# EAGLE board UavxMbedV1v1 (EAGLE 5.09)
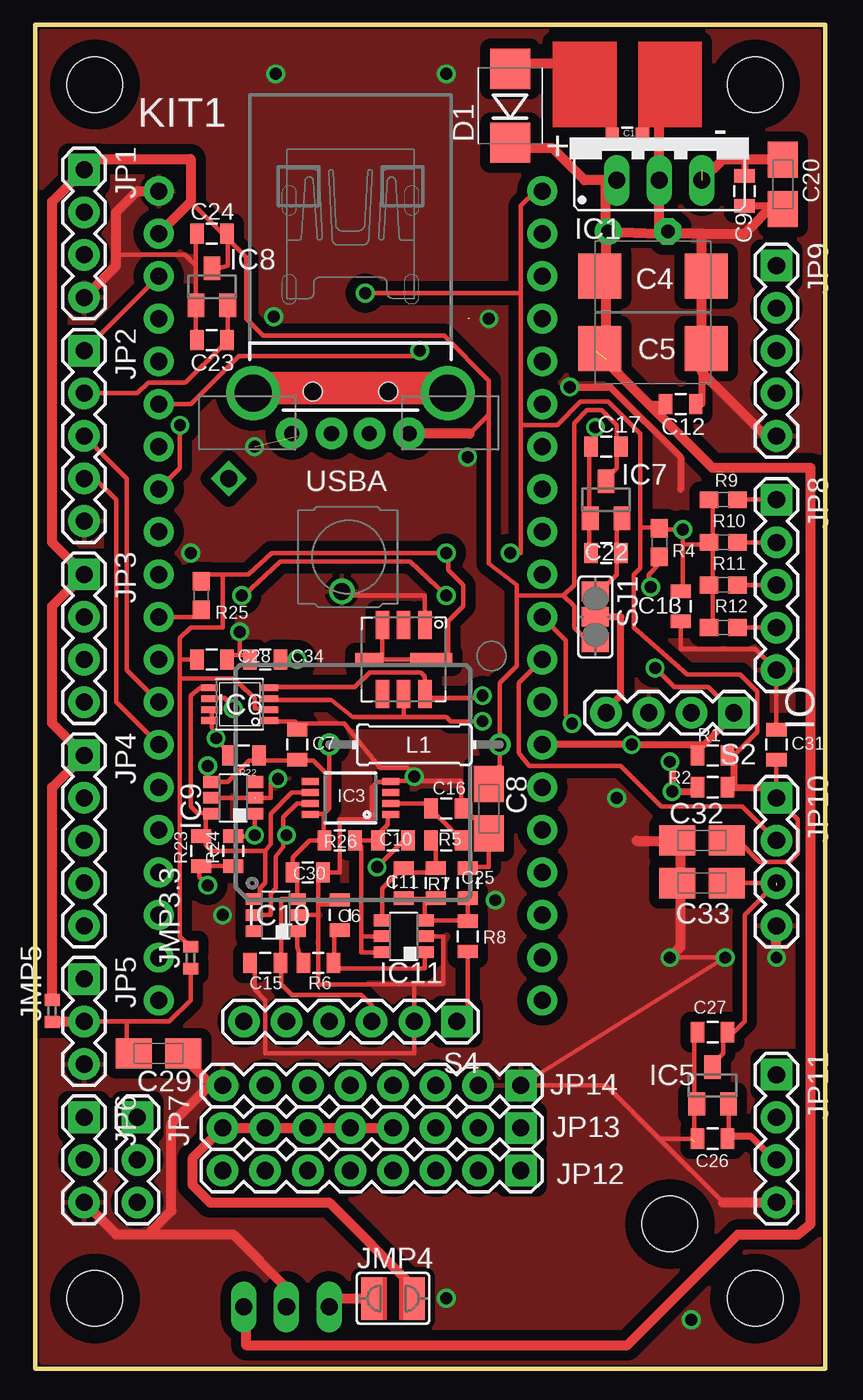
[diagram p0: board, top side]
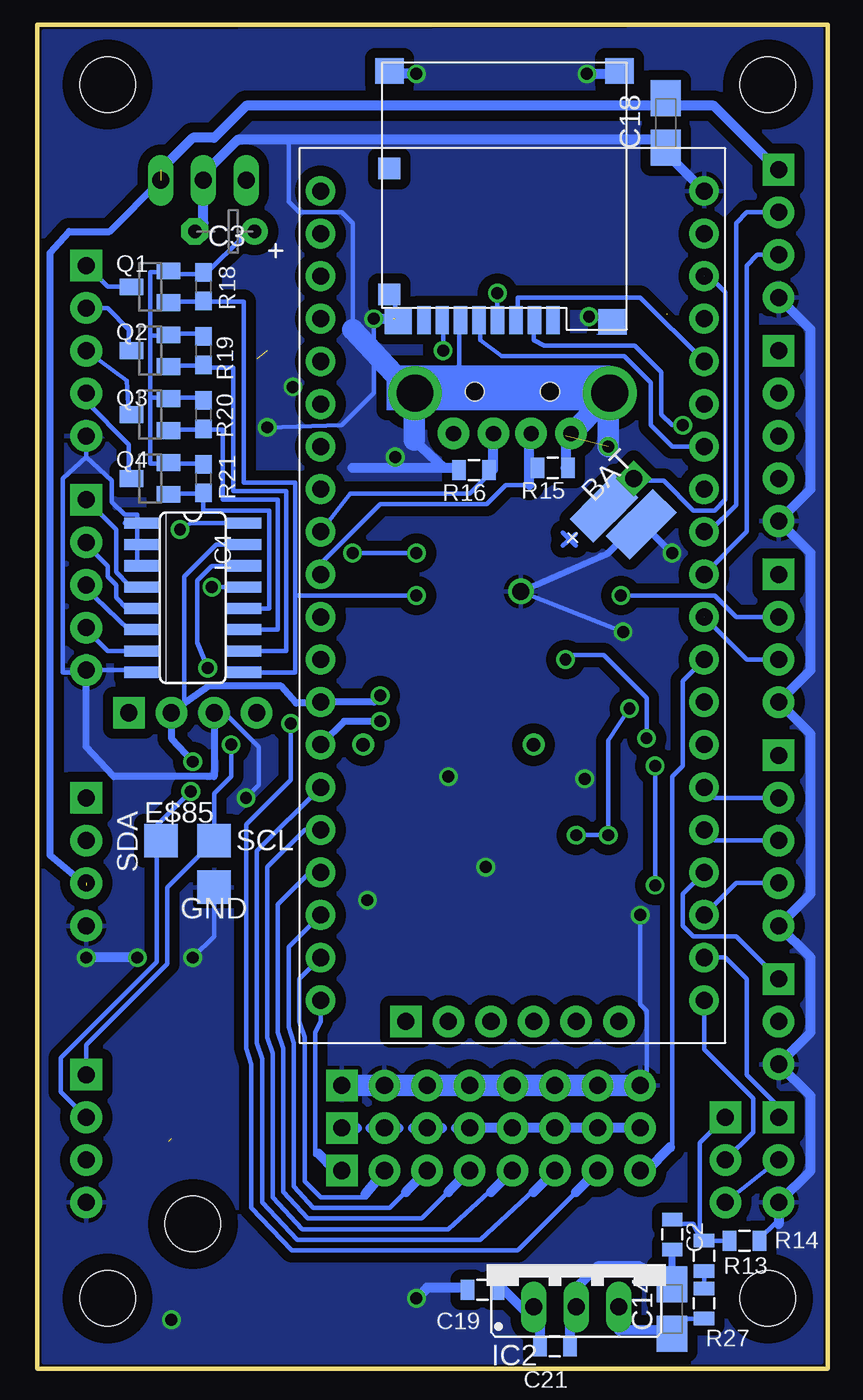
[diagram p1: board, bottom side, seen from below]

No outline drawn. Coordinates in mm, seen from the top.
Copper layers (1*16): Top 0.035mm / dielectric 1.5mm / Bottom 0.035mm
Design rules "default": minimum track width 10mil, minimum drill 24mil, track to track 8mil, track to pad 8mil, pad to pad 8mil, via to via 8mil, smd to smd 8mil, copper to edge 40mil, drill to drill 8mil, minimum pad ring 10mil, minimum via ring 8mil, stop-mask expansion 4mil, vias tented up to drill 0mil, thermal gap 10mil
tKeepout: area 20.7,2.9 to 22,5.5
Milling: 4 lines

## Footprints (pad centres in the part's own frame; a part is rotated, then mirrored left to right if it is on the bottom)
TP20SQ = smd 2 x 2: TP 0,0
0805 = smd 0.8 x 1.2: 1 -0.9,0; 2 0.9,0
E3,5-8 = drill 0.813 pad 1.6 round: + -1.778,0 | drill 0.813 pad 1.6 octagon: - 1.778,0
D/7343-31R = smd 2.55 x 2.7: + 3.175,0; - -3.175,0
A/3216-18W = smd 2.15 x 1.8: + 1.475,0; - -1.475,0
SMB-DIODE = smd 2.4 x 2.4: A 2.2,0; C -2.2,0
STAND-OFF = hole 3.302: 0,0
78XXS = drill 1.016 long: GND 0,-2.54; IN -2.54,-2.54; OUT 2.54,-2.54
MSOP-8 = smd 0.41 x 1.02: 1 -0.975,-2.4; 2 -0.325,-2.4; 3 0.325,-2.4; 4 0.975,-2.4; 5 0.975,2.4; 6 0.325,2.4; 7 -0.325,2.4; 8 -0.975,2.4
SO16 = smd 0.66 x 2.032: 1 -4.445,-3.073; 2 -3.175,-3.073; 3 -1.905,-3.073; 4 -0.635,-3.073; 5 0.635,-3.073; 6 1.905,-3.073; 7 3.175,-3.073; 8 4.445,-3.073; 9 4.445,3.073; 10 3.175,3.073; 11 1.905,3.073; 12 0.635,3.073; 13 -0.635,3.073; 14 -1.905,3.073; 15 -3.175,3.073; 16 -4.445,3.073
SOT23 = smd 1 x 1.4: 1 -0.95,-1.1; 2 0.95,-1.1; 3 0,1.1
SSOP08 = smd 0.4 x 1: 1 -0.975,-1.8; 2 -0.325,-1.8; 3 0.325,-1.8; 4 0.975,-1.8; 5 0.975,1.8; 6 0.325,1.8; 7 -0.325,1.8; 8 -0.975,1.8
DBV_R-PDSO-G6 = smd 0.69 x 0.99: 1 -0.95,-1.29; 2 0,-1.29; 3 0.95,-1.29; 4 0.95,1.3; 5 0,1.3; 6 -0.95,1.3
R0402 = smd 0.7 x 0.9: 1 -0.65,0; 2 0.65,0
SJW = smd 1.27 x 2.54: 1 -1.27,0; 2 1.27,0
1X04 = drill 1.016 pad 1.88 square: 1 0,0 | drill 1.016 pad 1.88 round: 2 2.54,0; 3 5.08,0; 4 7.62,0
1X05 = drill 1.016 pad 1.88 square: 1 0,0 | drill 1.016 pad 1.88 round: 2 2.54,0; 3 5.08,0; 4 7.62,0; 5 10.16,0
1X03 = drill 1.016 pad 1.88 square: 1 0,0 | drill 1.016 pad 1.88 round: 2 2.54,0; 3 5.08,0
1X08 = drill 1.016 pad 1.88 square: 1 0,0 | drill 1.016 pad 1.88 round: 2 2.54,0; 3 5.08,0; 4 7.62,0; 5 10.16,0; 6 12.7,0; 7 15.24,0; 8 17.78,0
MBED-KIT = drill 1.016 pad 1.778 round: D+ 11.43,1.27; D- 11.43,3.81; GND -11.43,24.13; IF+ 11.43,16.51; IF- 11.43,19.05; NR -11.43,16.51; P$5 -11.43,13.97; P$6 -11.43,11.43; P$7 -11.43,8.89; P$8 -11.43,6.35; P$9 -11.43,3.81; P$10 -11.43,1.27; P$11 -11.43,-1.27; P$12 -11.43,-3.81; P$13 -11.43,-6.35; P$14 -11.43,-8.89; P$15 -11.43,-11.43; P$16 -11.43,-13.97; P$17 -11.43,-16.51; P$18 -11.43,-19.05; P$19 -11.43,-21.59; P$20 -11.43,-24.13; P$21 11.43,-24.13; P$22 11.43,-21.59; P$23 11.43,-19.05; P$24 11.43,-16.51; P$25 11.43,-13.97; P$26 11.43,-11.43; P$27 11.43,-8.89; P$28 11.43,-6.35; P$29 11.43,-3.81; P$30 11.43,-1.27; RD+ 11.43,11.43; RD- 11.43,13.97; TD+ 11.43,6.35; TD- 11.43,8.89; VB -11.43,19.05; VIN -11.43,21.59; VOUT 11.43,24.13; VU 11.43,21.59
LAL03 = drill 0.8 pad 1.3 round: 1 -5.08,0; 2 5.08,0
0603 = smd 1.1 x 1: 1 -0.85,0; 2 0.85,0
BMP085 = smd 1.67 x 0.8: 1 -2.065,1.27; 2 -2.065,0; 3 -2.065,-1.27; 5 2.065,-1.27; 6 2.065,0; 7 2.065,1.27 | smd 0.8 x 1.67: 4 0,-2.065 | smd 0.8 x 2.5: 8 0,1.65
1X06 = drill 1.016 pad 1.88 square: 1 0,0 | drill 1.016 pad 1.88 round: 2 2.54,0; 3 5.08,0; 4 7.62,0; 5 10.16,0; 6 12.7,0
SD-502774-001 = smd 0.8 x 1.68: P$1 3.4,-0.85; P$2 1.2,-0.85; P$3 2.3,-0.85; P$4 4.5,-0.85; P$5 5.6,-0.85; P$6 6.7,-0.85; P$7 7.8,-0.85; P$8 8.9,-0.85 | smd 1.7 x 1.5: P$9 12.86,14.02; P$10 12.45,-0.95; P$11 -0.85,14.02 | smd 1.3 x 1.29: P$12 -0.86,8.2; P$13 -0.86,0.691 | smd 1.6 x 1.5: P$14 -0.327,-0.925
SJ_2 = smd 1.168 x 1.6: 1 -1.524,0; 2 0,0; 3 1.524,0
USB-A-H = drill 0.914 pad 1.88 round: D+ 2.4,1.127; D- 2.4,-1.127; GND 2.4,3.5; VBUS 2.4,-3.5 | drill 2.2 round: GND@1 0,5.8; GND@2 0,-5.8 | hole 1.1: -0.1,2.25; -0.1,-2.25
BATTERY = drill 1.016 square: P$1 0,-9.525 | drill 1.016 round: P$2 0,0

## Placement (x,y rotation side)
+  [TP20SQ]  13.97,50.67 225.2 bottom
BAT  [TP20SQ]  12.7,51.94 225.2 bottom
C1  10UF  [0805]  35.31,73.41 0 top
C2  .1uf  [0805]  9.27,8 270 bottom
C3  300uf  [E3,5-8]  35.94,67.82 180 bottom
C4  100uf  [D/7343-31R]  36.83,65.15 180 top
C5  100uf  [D/7343-31R]  36.83,60.83 180 top
C6  .1uf  [0805]  18.16,27.05 270 top
C7  1uf  [0805]  15.62,37.21 270 top
C8  [A/3216-18W]  27.05,33.4 270 top
C9  .1uf  [0805]  42.29,70.23 270 top
C10  .1uf  [0805]  21.34,31.5 180 top
C11  1uf  [0805]  21.97,28.96 90 top
C12  .1uf  [0805]  38.48,57.53 0 top
C13  .1uf  [0805]  38.48,45.47 270 top
C14  33uf  [A/3216-18W]  9.27,3.56 270 bottom
C15  10uf  [0805]  13.72,24.19 180 top
C16  .1uf  [0805]  24.51,33.4 180 top
C17  10uf  [0805]  34.04,54.99 0 top
C18  33uf  [A/3216-18W]  9.65,74.3 90 bottom
C19  1uf  [0805]  20.57,4.7 180 bottom
C20  [A/3216-18W]  44.58,70.61 90 top
C21  .1uf  [0805]  16.26,1.33 180 bottom
C22  1uf  [0805]  34.04,48.64 0 top
C23  [0805]  10.54,61.34 0 top
C24  [0805]  10.54,67.69 0 top
C25  470uuf  [0805]  25.78,28.96 270 top
C26  [0805]  40.39,13.72 0 top
C27  [0805]  40.39,20.07 0 top
C28  .1  [0805]  10.54,42.29 0 top
C29  33uf  [A/3216-18W]  7.37,18.8 180 top
C30  .1uf  [0805]  16.26,29.59 0 top
C31  .1uf  [0805]  44.2,37.21 270 top
C32  [A/3216-18W]  39.75,31.5 0 top
C33  [A/3216-18W]  39.75,28.96 0 top
C34  .1  [0805]  13.72,42.29 0 top
D1  [SMB-DIODE]  28.32,75.31 90 top
E$8  [STAND-OFF]  3.56,76.58 0 top
E$11  [STAND-OFF]  3.56,4.19 0 top
E$12  [STAND-OFF]  42.93,4.19 0 top
E$13  [STAND-OFF]  42.93,76.58 0 top
E$19  [STAND-OFF]  37.85,8.64 0 top
E$85  [TP20SQ]  39.75,31.5 0 bottom
E$112  [TP20SQ]  10.41,51.05 225.2 bottom
E$113  [TP20SQ]  11.81,49.66 225.2 bottom
GND  [TP20SQ]  36.58,28.7 0 bottom
IC1  [78XXS]  37.21,73.41 0 top
IC2  [78XXS]  14.99,6.22 0 bottom
IC3  [MSOP-8]  18.8,34.04 90 top
IC4  [SO16]  37.85,45.97 270 bottom
IC5  [SOT23]  40.39,16.89 0 top
IC6  PCA9306  [SSOP08]  12.19,39.62 90 top
IC7  [SOT23]  34.04,51.82 0 top
IC8  [SOT23]  10.54,64.52 0 top
IC9  [DBV_R-PDSO-G6]  11.81,34.04 90 top
IC10  [DBV_R-PDSO-G6]  14.35,27.05 90 top
IC11  [DBV_R-PDSO-G6]  21.97,25.78 90 top
JMP3.3  [R0402]  9.27,24.51 90 top
JMP4  [SJW]  21.34,4.19 0 top
JMP5  [R0402]  1.02,21.34 90 top
JP1  [1X04]  2.92,71.5 270 top
JP2  [1X05]  2.92,60.71 270 top
JP3  [1X04]  2.92,47.37 270 top
JP4  [1X05]  2.92,36.58 270 top
JP5  [1X03]  2.92,23.24 270 top
JP6  [1X03]  2.92,14.99 270 top
JP7  [1X03]  6.1,14.99 270 top
JP8  [1X05]  44.2,51.82 270 top
JP9  [1X05]  44.2,65.79 270 top
JP10  [1X04]  44.2,34.04 270 top
JP11  [1X04]  44.2,17.53 270 top
JP12  [1X08]  28.96,14.35 180 top
JP13  [1X08]  28.96,11.81 180 top
JP14  [1X08]  28.96,16.89 180 top
KIT1  [MBED-KIT]  18.8,46.1 0 top
L1  871-B78108S1154J  [LAL03]  22.61,37.21 180 top
Q1  [SOT23]  40.39,64.52 90 bottom
Q2  [SOT23]  40.39,60.71 90 bottom
Q3  [SOT23]  40.39,56.9 90 bottom
Q4  [SOT23]  40.39,53.09 90 bottom
R1  [0805]  40.39,34.67 0 top
R2  [0805]  40.39,36.58 180 top
R4  [0603]  37.21,49.28 270 top
R5  .1uf  [0805]  24.51,31.5 180 top
R6  [0805]  16.89,24.19 180 top
R7  [0805]  23.88,28.96 90 top
R8  [0805]  25.78,25.78 90 top
R9  [0603]  41.02,51.82 0 top
R10  [0603]  41.02,49.28 0 top
R11  [0603]  41.02,46.74 0 top
R12  [0603]  41.02,44.2 0 top
R13  [0805]  7.37,6.73 270 bottom
R14  [0805]  4.95,7.62 0 bottom
R15  15k  [0805]  16.38,53.72 180 bottom
R16  15k  [0805]  21.08,53.59 180 bottom
R18  [0603]  37.21,64.52 270 bottom
R19  [0603]  37.21,60.71 270 bottom
R20  [0603]  37.21,56.9 270 bottom
R21  [0603]  37.21,53.09 270 bottom
R22  [0805]  12.45,36.58 180 top
R23  [0805]  9.91,30.86 90 top
R24  [0805]  11.81,30.86 90 top
R25  [0603]  9.91,46.1 90 top
R26  [0805]  18.16,31.5 180 top
R27  [0805]  7.37,3.89 270 bottom
S2  [1X04]  41.66,39.12 180 top
S3  BMP085  [BMP085]  21.97,42.29 270 top
S4  [1X06]  25.15,20.7 180 top
SCL  [TP20SQ]  36.58,31.5 0 bottom
SDA  [TP20SQ]  39.75,31.5 0 bottom
SF-MICROSD  [SD-502774-001]  25.27,63.37 0 bottom
SJ1  [SJ_2]  33.4,44.83 270 top
USBA  [USB-A-H]  18.8,58.17 270 top
VB  [BATTERY]  18.29,46.35 225 top

## Library data of the parts
+ BAT E$85 E$112 E$113 GND SCL SDA = testpad
C1 C2 C6 C7 C9-C13 C15-C17 C19 C21-C28 C30 C31 C34 D1 E$8 E$11-E$13 E$19 IC3 IC4 JMP4 JP1-JP14 Q1-Q4 R1 R2 R4-R16 R18-R27 S2-S4 SJ1 USBA = SparkFun
C3-C5 C8 C14 C18 C20 C29 C32 C33 JMP3.3 JMP5 L1 = rcl
IC1 IC2 = v-reg
IC5 IC7 IC8 = led
IC6 IC9-IC11 = 74xx-little-de
KIT1 = MBED_v2.1kiss
SF-MICROSD = KissSystems
VB = KissBattery

## Nets
5V: IC1.OUT JP1.1 JP10.3 L1.1
5VA: L1.2
GND: GND.TP JP1.4 JP2.5 JP5.3 JP6.3 JP8.5 JP9.5 JP10.4 JP11.4 JP14.1 JP14.2 JP14.8 KIT1.GND S2.3 VB.P$2
S2: SJ1.2
S$1: JP1.2
S$2: JP1.3
S$4: KIT1.P$5
S$6: JP2.3
S$7: JP5.1
S$8: JP4.4
S$9: JP4.3
S$10: JP4.2
S$11: JP6.1
S$13: JP6.2
S$16: JP2.4
S$22: JMP4.1
S$23: JP2.2
S$25: C3.+
S$32: JP12.4 JP12.5 JP12.8
S$33: JP13.7
S$34: JP3.3
S$35: KIT1.D-
S$36: JP8.2
S$37: JP8.1
S$38: JP8.3
S$39: JP8.4
S$50: JP9.4
S$60: JP10.2
S$65: JP9.3
S$66: JP9.2
S$67: JP9.1
S$70: JP2.1
S$76: IC1.GND
S$88: SCL.TP
S$89: JP3.2
S$100: S2.1
S$105: S2.2
S$112: JP11.2
S$113: KIT1.D+
S$114: JP10.1 KIT1.VOUT
S$119: JP5.2
S$122: JP7.1
S$130: KIT1.P$28
S$134: JP13.8 KIT1.P$12
S$135: KIT1.P$27
S$136: JP13.1

## Tracks (layer width: path | path; a pad name or v marks a point on that pad's centre or on a via)
5V  (2 unrouted)
  Top 0.254: 32.77,43.56 32.13,44.2 32.13,45.47 31.5,46.1 | 41.66,20.07 42.29,20.7 42.29,27.05 JP10.3 41.02,28.96 | 28.7,46.1 31.5,46.1 | 28.7,46.1 28.7,41.91 27.69,40.89 L1.1 27.69,35.94 27.05,35.31 | 28.7,46.1 28.7,46.74 28.57,46.86 27.05,48.01 27.05,56.9 | 27.05,56.9 25.91,55.75 | 27.05,56.9 27.05,58.93 24.38,61.59 13.59,61.59 12.57,62.61 12.57,66.29 11.49,67.37 | 10.54,65.47 11.49,65.79 11.49,67.37 | 9.27,69.6 11.49,67.37 | 31.5,46.1 32.13,46.74 32.13,56.39 32.89,57.15 33.78,57.15 34.67,56.26 34.67,55.37
  Top 0.406: 42.29,72.14 42.29,71.5
  Top 0.61: 25.91,55.75 22.35,55.75 | 7.37,67.69 9.27,69.6 9.27,72.14 3.56,72.14 JP1.1 1.02,69.6 1.02,49.28 2.92,47.37 1.02,45.47 1.02,38.48 2.92,36.58 1.02,34.67 1.02,21.97 | 44.2,72.14 42.29,72.14 41.02,72.14 IC1.OUT
  Bottom 0.406: 44.2,28.83 46.35,30.61 46.35,66.55 45.21,67.82 42.8,67.82 IC1.OUT
  Bottom 0.61: 39.75,71.5 37.85,73.41 36.58,73.41 34.67,75.31 6.78,75.31 3.61,72.14 JP1.1
5VA
  Top 0.254: 17.21,33.08 16.57,33.08 | 17.21,33.08 17.21,31.81 | 17.21,33.08 17.53,33.4 17.53,35.31 | 17.53,35.31 L1.2 | 17.53,35.31 16.57,36.26 12.76,36.26 11.49,34.99 10.54,34.99
GND  (via drill 0.71, 0.71 pad 0.81)  (4 unrouted)
  Top 0.254: 21.02,34.99 20.38,34.99 20.07,34.67 20.07,32.77 18.16,32.77 18.16,29.59 17.21,29.59 | 9.59,62.87 9.59,61.34 | 9.59,65.79 9.59,67.06 | 9.59,65.79 9.59,62.93 | 9.59,65.79 8.95,66.42 4.83,66.42 | JP14.8 10.54,16.89 | 23.29,25.78 24.33,25.78 24.33,22.94 22.61,22.94 22.61,20.7 | 13.08,23.88 13.08,22.61 13.72,21.97 13.72,18.8 22.61,18.8 22.61,20.7 | 22.61,20.7 22.59,18.81 | 16.89,27.69 16.89,29.91 | 16.89,27.69 18.16,27.69 | 16.89,27.05 16.89,27.69 | 16.89,27.05 15.94,27.05 | 16.89,27.05 16.89,22.92 22.64,22.92 | 39.31,13.53 39.31,19.68 | 37.21,13.72 41.02,9.91 | 37.21,13.72 39.12,13.72 | v37.85,24.51 v41.15,24.51 JP14.1 34.04,16.89 37.21,13.72 | 14.35,35.24 14.03,34.92 14.03,34.04 10.54,34.04 | v20.38,29.91 21.97,31.5 | 12.19,42.55 v12.19,43.94 | 25.4,33.66 25.4,35.05 22.61,35.05 | 22.61,35.05 21.46,35.05 | 22.61,35.05 v22.61,35.31 22.61,35.43 22.23,35.81 20.57,35.81 18.41,38.48 15.49,38.48 15.49,38.61 14.22,38.61 | 23.24,44.83 23.24,46.1 18.16,46.1 | 38.48,44.2 38.48,42.93 42.93,42.93 JP8.5 44.2,37.97 | v33.4,56.13 33.4,54.99
  Top 0.406: 39.32,57.53 39.75,57.53 39.75,59.44 | 38.48,52.45 38.48,54.36 34.29,58.55 v31.88,58.55
  Top 0.61: KIT1.GND 6.1,70.23 4.83,68.96 4.83,66.42 4.83,65.79 JP1.4 | 10.54,16.89 8.64,18.8 | JP14.8 10.41,16.89 8.13,14.61 8.13,9.4 6.73,8 | 14.99,3.56 14.99,4.83 11.81,8 6.73,8 | 6.73,8 4.83,8 JP6.3 | 38.48,31.5 38.48,25.15 v37.85,24.51 | 41.02,9.91 JP11.4 | v44.2,24.51 JP10.4 | 39.75,60.07 39.75,59.44 43.56,55.63 JP9.5 | 35.87,31.47 38.35,31.47 | 44.2,69.6 42.29,67.69 39.75,67.69 | 39.75,67.69 37.21,67.69 | 39.75,60.71 39.75,67.69
  Bottom 0.254: v11.18,27.05 11.18,21.72 10.79,21.34 10.79,17.27 JP14.8 | 4.19,7.62 2.92,8.89 JP6.3 | GND.TP 36.58,25.78 v37.85,24.51 | 20.19,29.59 20.45,29.84 | v12.19,43.94 VB.P$2 | 41.78,50.55 41.91,50.42 41.15,50.42 | 41.15,50.42 41.15,47.88 | 41.15,50.42 41.15,50.93 41.91,50.93 42.67,51.69 42.67,52.96 44.2,54.36 | 44.2,54.36 JP9.5 | 44.2,54.36 45.59,53.09 45.59,41.53 44.2,41.53 JP8.5 41.66,41.66 | S2.3 36.58,38.99 35.81,38.99 33.91,37.08 33.91,34.8 v34.67,34.04 | 32.13,73.41 32.13,69.6 31.5,68.96 28.96,68.96 28.32,68.33 28.32,61.98 | 21.97,61.98 21.97,59.82 24.64,58.04 22.61,59.44 | v14.22,62.74 13.46,62.87 | 25.78,62.61 25.78,63.88 | v33.4,56.13 28.96,56.26 27.05,58.17 v27.05,62.61
  Bottom 0.406: 11.18,50.52 10.54,51.18 | 11.18,50.52 9.27,48.62 | 11.18,50.52 13.08,48.64 13.54,48.44 VB.P$2 | JP8.5 44.2,37.08 42.55,35.31 36.58,35.31 36.58,38.99
  Bottom 0.61: 14.99,3.56 14.99,4.83 13.72,6.1 11.18,6.1 10.54,5.46 8.64,5.46 | 37.34,70.87 37.34,71.12 35.18,73.28 10.41,73.28 KIT1.GND | JP1.4 1.02,61.98 1.02,52.45 JP2.5 1.02,48.64 1.02,41.66 2.92,39.75 1.02,37.85 1.02,28.32 2.92,26.42 1.02,24.51 1.02,20.07 JP5.3 1.02,16.26 1.02,11.81 JP6.3 2.92,8.64 | v24.51,4.19 23.88,4.83 21.46,4.83 | v41.15,24.51 v44.2,24.51 | 15.62,55.63 15.62,53.72 | 22.86,53.72 28.32,53.72 | 22.86,53.72 24.64,55.37 | 22.1,53.72 22.86,53.72 | v27.05,62.61 25.91,62.61 | v14.35,77.22 12.83,77.22 | v24.51,77.22 25.65,77.22
  Bottom 1.27: JP14.8 28.64,16.89 | v13.08,54.99 13.08,58.17 | 28.32,61.98 24.64,58.04 24.64,55.37
  other vias: 39.12,2.92 14.48,35.18 27.43,27.94 9.27,48.64 25.78,54.36
  pour Top (isolate 0.61): 0.38,79.76 0.38,0.38 46.74,0.38 46.74,79.76
  pour Bottom (isolate 0.61): 0.38,0.38 46.74,0.38 46.74,79.76 0.38,79.88
S2
  Top 0.406: SJ1.2 34.92,44.83 34.92,40.13 34.04,39.24
S$1
  Bottom 0.254: JP1.2 4.83,68.96 5.46,68.33 5.46,51.5 7.05,49.91 7.37,49.91
S$2
  Bottom 0.254: JP1.3 4.19,66.42 4.83,65.79 4.83,49.91 7.37,47.37
S$3
  Bottom 0.254: 30.23,32.13 31.18,32.13 33.4,29.91 33.4,19.75 33.08,18.8 33.08,10.22 31.3,8.32 22.61,8.32 18.8,11.81
  Bottom 0.61: 18.8,11.81 20.07,10.54
S$4
  Bottom 0.254: 18.48,62.93 18.48,63.88 11.18,63.88 KIT1.P$5
S$5
  Bottom 0.254: 34.04,67.69 34.67,67.69 37.21,65.15
S$6
  Top 0.254: JP2.3 5.46,53.09 5.46,41.66 7.37,39.75
S$7
  Bottom 0.254: 7.37,29.59 8.64,28.32 8.64,26.42 8,25.78 5.46,25.78 JP5.1
S$8
  Bottom 0.254: JP4.4 5.46,28.96 7.37,27.05
S$9
  Bottom 0.254: JP4.3 6.73,31.5 7.37,32.13
S$10
  Bottom 0.254: JP4.2 6.73,34.04 7.37,34.67
S$11
  Bottom 0.254: 7.37,24.51 6.1,24.51 4.83,23.24 4.83,17.53 2.92,15.62 JP6.1
S$12
  Bottom 0.254: 6.1,12.45 4.45,14.1 4.45,16.13 7.37,19.05 7.37,22.1
S$13
  Bottom 0.254: JP6.2 6.1,9.91
S$14
  Bottom 0.254: 44.32,49.28 42.93,47.88 42.93,47.24 42.42,46.74 42.42,45.97 41.78,45.34
S$15
  Top 0.254: 9.91,40.64 9.27,40.13 9.27,33.53 9.65,33.15 10.16,33.15 | 10.16,33.15 10.29,33.15 | 10.16,33.15 10.16,31.24 10.54,30.86 13.72,30.86 | 16.26,34.35 15.3,34.35 14.03,33.08 14.03,31.3 13.72,30.86 | 13.72,30.86 13.72,28.96 13.4,28.64 13.4,28
S$16
  Top 0.254: JP2.4 3.56,53.09 4.83,51.82 4.83,39.75 7.37,37.21
S$17
  Bottom 0.254: 24.49,46.1 31.73,46.1
S$18
  Bottom 0.254: 7.37,54.99 9.27,54.99 10.54,56.26 10.54,58.8 12.13,60.39 19.43,60.39 20.7,61.34 20.7,61.98
S$19  (via drill 0.71)
  Top 0.254: v13.08,31.81 13.08,33.08
  Bottom 0.254: v13.08,31.81 v14.99,31.81
S$20
  Top 0.254: 41.02,20.07 41.02,18.8 40.39,18.16
S$21  (via drill 0.71)
  Top 0.254: v8.64,56.26 8.64,53.72 7.37,52.45
  Bottom 0.254: 17.53,61.98 17.53,61.34 16.89,61.02 11.49,61.02 9.91,59.44 9.91,56.9 9.27,56.26 v8.64,56.26
S$22
  Top 0.61: 17.53,4.19 JMP4.1
S$23
  Top 0.254: JP2.2 6.1,58.17 6.73,58.8 8.95,58.8 11.18,61.02
S$24  (via drill 0.71)
  Top 0.254: v22.92,60.71 22.61,60.39 12.13,60.39 9.27,57.53 7.37,57.53
  Bottom 0.254: v22.92,60.71 22.92,61.98
S$25
  Top 0.61: 37.21,70.74 37.21,67.69 C3.+
S$26
  Bottom 0.254: 41.78,41.53 41.66,41.53
S$27
  Top 0.254: 11.49,62.93 11.49,61.02
S$28
  Top 0.254: 33.02,48.51 33.02,54.99
S$29
  Bottom 0.406: 15.75,55.75 15.37,55.75
S$30
  Top 0.254: 26.67,40.01 23.5,40.01 23.24,40.26 23.24,41.27 22.99,41.53 19.94,41.53 19.05,40.64 14.35,40.64
S$31
  Bottom 0.61: 17.14,1.4 17.14,3.3
S$32
  Top 0.61: 21.46,14.35 JP12.5 JP12.8 9.4,12.57 9.4,10.92 10.41,9.91 17.53,9.91 22.61,4.83
  Bottom 0.61: 22.15,14.35 JP12.4 JP12.8
S$33  (via drill 0.71)
  Top 0.254: 30.23,44.83 31.62,43.43 31.62,38.99 v32,38.48
  Bottom 0.254: 14.99,10.54 18.48,7.05 31.94,7.05 34.35,9.59 34.35,18.16 34.67,19.11 34.67,32.45 32,35.12 v32,38.48
  Bottom 0.61: JP13.7 14.99,10.54
S$34  (1 unrouted)
  Top 0.254: 7.37,44.83 9.91,44.83
  Bottom 0.254: 3.87,42.29 JP3.3 4.83,42.29 7.37,44.83
S$35
  Bottom 0.254: 19.94,53.59 21.34,52.2 28.45,52.2 KIT1.D-
  Bottom 0.61: 19.94,53.59 19.94,55.75
S$36
  Top 0.254: 42.29,49.28 JP8.2
S$37
  Top 0.254: JP8.1 42.29,51.82
  Bottom 0.254: JP8.1 42.42,50.04 42.42,47.5 41.66,46.74 41.02,46.74
S$38
  Top 0.254: 42.29,46.74 JP8.3
S$39
  Top 0.254: 42.29,44.2 JP8.4
S$40
  Bottom 0.254: 37.34,52.2 38.73,52.2 38.73,52.07
S$41
  Bottom 0.254: 37.21,56.01 38.86,56.01
S$42
  Top 0.254: 10.54,39.12 10.54,38.23 11.43,36.7
S$43
  Bottom 0.254: 37.21,59.82 38.99,59.82 38.99,59.69
S$44
  Bottom 0.254: 37.34,63.63 38.86,63.63 38.86,63.5
S$45
  Top 0.61: 17.4,4.83 17.4,3.68
S$46
  Bottom 0.254: 37.47,57.91 38.86,57.91
S$47
  Bottom 0.254: 37.34,61.72 38.99,61.72
S$48
  Bottom 0.254: 37.34,65.28 38.86,65.28
S$49
  Bottom 0.254: 37.34,53.98 38.99,53.98
S$50
  Bottom 0.254: JP9.4 44.2,57.66 41.66,55.12 41.66,53.21
S$51
  Bottom 0.254: 35.43,49.15 36.45,49.15 38.35,47.24 38.35,39.75
S$52  (via drill 0.71 pad 0.81)
  other vias: 36.7,46.61
S$53
  Top 0.254: 36.58,46.74 36.58,47.37 37.21,48.01
S$54
  Bottom 0.254: 33.78,45.34 33.91,45.34
S$55
  Bottom 0.254: 34.16,45.34 33.27,45.34 33.27,51.18 37.21,51.18 37.21,52.2
S$56
  Bottom 0.254: 34.04,42.8 32.26,42.8 32.26,52.32 35.43,52.32 35.43,59.69 36.96,59.69
S$57
  Bottom 0.254: 33.78,41.53 33.91,41.53
S$58
  Bottom 0.254: 38.61,50.04 37.97,50.42 35.56,50.42
S$59
  Bottom 0.254: 41.66,44.07 44.32,46.61
S$60
  Top 0.254: JP10.2 42.16,33.53 37.34,33.53 34.92,35.94 29.46,35.94 28.83,36.7 28.83,40.89 30.23,42.29
S$61
  Top 0.254: 40.39,44.2 40.39,51.82
S$62
  Top 0.406: 41.27,13.84 42.67,13.84 44.2,12.32
S$63
  Bottom 0.254: 41.78,49.15 41.4,49.15
S$64
  Top 0.254: 17.14,31.5 16.38,31.5 15.37,30.48 15.37,29.84
S$65
  Bottom 0.254: 41.66,57.02 41.78,58.93 JP9.3
S$66
  Bottom 0.254: 41.66,60.71 41.66,61.98 42.93,63.25 JP9.2
S$67
  Bottom 0.254: 41.53,64.52 42.93,64.52 JP9.1
S$68
  Bottom 0.254: 34.04,44.07 33.78,44.07
S$69
  Bottom 0.254: 34.29,44.07 32.77,44.07 32.77,51.82 36.07,51.82 36.07,56.01 36.96,56.01
S$70  (1 unrouted)
  Top 0.254: JP2.1 7.37,65.15
  Bottom 0.254: 7.37,65.15 7.05,65.15 6.1,64.2 6.1,51.82 6.73,51.18 8,51.18 9.78,52.96 11.43,52.96
S$71
  Top 0.254: 23.24,24.83 23.24,23.88 18.16,23.88
S$72
  Bottom 0.254: 34.04,41.53 31.75,41.53 31.75,52.83 34.8,52.83 34.8,63.63 36.96,63.63
S$73
  Bottom 0.254: 35.43,46.61 36.83,46.61
S$74
  Top 0.254: 23.24,28 21.97,28 | 23.24,28 23.88,28 | 23.24,28 23.24,26.73 25.78,26.73 25.78,28
S$75
  Top 0.254: 25.78,24.83 25.78,21.34 25.15,20.7
S$76
  Top 0.61: IC1.GND 37.21,75.31
  Bottom 0.61: 37.08,71.63 37.21,71.63 IC1.GND
S$77
  Top 0.254: 20.7,26.73 20.7,28.64 21.65,29.59 23.88,29.59 23.88,31.5
S$78
  Top 0.254: 20.7,24.83 19.43,24.83 19.43,25.78 | 19.43,25.78 19.43,31.18 | 19.43,25.78 20.7,25.78
S$79
  Top 0.254: 20.07,20.7 20.07,21.65 19.43,22.29 15.3,22.29 14.67,22.92 14.67,28 15.3,28
S$80
  Bottom 0.254: 41.53,42.8 42.93,42.8 44.2,44.07
S$81
  Top 0.254: 15.62,25.78 15.62,25.15 15.94,24.19
S$82
  Top 0.254: 17.84,24.51 17.84,26.1
S$83
  Top 0.254: 21.65,33.72 23.24,33.72 25.15,31.81
S$84
  Top 0.254: 15.62,29.91 15.62,28
S$85
  Top 0.406: 37.97,34.42 39.24,34.42
S$86  (via drill 0.71 pad 0.81)
  Top 0.254: 38.61,49.15 38.61,46.61 | 38.61,49.15 v38.61,50.04 37.34,50.04 | 38.61,49.15 39.88,49.15
S$87
  Top 0.254: 15.94,33.72 15.62,33.72 14.8,32.89 14.8,31.11 14.35,30.54 14.35,28.64 14.03,28.32 14.03,27.05 13.4,27.05
S$88  (via drill 0.71)
  Top 0.406: 41.78,39.12 39.88,37.21 v35.56,37.21 30.23,37.21
  Bottom 0.254: v35.56,37.21 35.56,35.31 36.58,34.29 SCL.TP 39.37,28.7 39.37,24.13 44.2,19.3 44.2,17.4
S$89  (via drill 0.71)
  Bottom 0.254: v12.32,46.1 6.73,46.1 5.46,44.83 JP3.2
S$90
  Bottom 0.61: 24.71,14.35 22.99,14.35
S$91
  Top 0.254: 34.67,50.55 34.67,47.37 33.4,46.1
S$92
  Top 0.254: 19.43,31.5 20.7,31.5
S$93
  Top 0.254: 21.02,33.08 21.02,32.45 20.38,31.81
S$94
  Bottom 0.254: 30.23,21.97 30.23,20.7 30.54,20.07 30.54,12.76 28.96,11.49
S$95
  Bottom 0.254: 30.23,24.51 31.5,23.24 31.5,20.7 31.18,19.75 31.18,11.18 30.23,10.22 27.5,10.22
S$96
  Bottom 0.254: 25.15,10.54 26.1,9.59 30.67,9.59 31.81,10.86 31.81,19.43 32.13,20.38 32.13,25.15 30.23,27.05
  Bottom 0.61: 23.88,11.81 25.15,10.54
S$97
  Bottom 0.254: 30.23,29.59 30.86,29.59 32.77,27.69 32.77,20.07 32.45,19.11 32.45,10.54 30.99,8.95 24.19,8.95 22.61,10.54
  Bottom 0.61: 21.34,11.81 22.61,10.54
S$98  (via drill 0.71)
  other vias: 24.51,46.1
S$99
  Bottom 0.61: 27.25,14.35 25.58,14.35
S$100  (via drill 0.71)
  Top 0.254: v36.96,41.78 38.1,40.64 40.13,40.64 S2.1
  Bottom 0.254: 35.43,47.88 36.7,47.88 37.59,46.99 37.59,43.31 v36.96,41.78
S$101
  Bottom 0.61: 37.21,70.23 37.21,68.33 37.85,67.69
S$102
  Top 0.61: 28.96,77.85 32.77,77.85
S$103
  Top 0.254: 11.81,31.75 13.08,31.75
S$104
  Top 0.254: 41.34,14.99 41.34,13.72
S$105  (via drill 0.71)
  Top 0.254: v37.85,36.2 37.97,36.2
  Top 0.406: 37.97,36.2 37.97,34.42
  Bottom 0.406: 30.1,39.69 31.69,39.69 32.58,40.7 36.89,40.7 S2.2 39.12,37.59 v37.85,36.2
S$106
  Bottom 0.61: 8.64,2.29 12.45,2.29 12.45,3.56
S$107
  Bottom 0.254: 16.26,11.81 20.7,7.68 31.62,7.68 33.72,9.91 33.72,18.48 34.04,19.43 34.04,30.86 30.23,34.67
  Bottom 0.61: 16.26,11.81 17.53,10.54
S$108
  Bottom 0.406: 9.27,5.71 9.27,7.11
S$109
  Top 0.254: 12.45,46.1 14.61,48.13 22.35,48.13 24.51,46.1
S$110
  Bottom 0.254: 5.84,7.62 7.49,7.62 8,8.64 9.27,8.64
S$111
  Bottom 0.254: 12.95,58.17 14.35,59.44
  Bottom 1.27: 12.95,58.17 15.24,55.75
S$112  (via drill 0.71)
  Bottom 0.254: v37.97,34.42 40.01,32.38 40.01,24.26 45.72,18.54 45.72,16.51 JP11.2
S$113
  Bottom 0.254: KIT1.D+ 30.23,48.01 26.67,51.56 20.32,51.56 19.18,52.7 17.78,52.7
  Bottom 0.61: 17.78,52.7 17.78,55.75
S$114  (via drill 0.71)
  Top 0.254: 41.4,31.5 41.91,31.5 43.18,30.23 44.96,30.23 45.47,30.73 45.47,32.77 JP10.1 44.2,36.45 | KIT1.VOUT 29.84,70.23 28.96,69.34 28.96,64.14 | 28.96,64.14 v19.68,64.14 | 28.96,56.26 28.96,64.14 | 28.96,56.26 31.11,56.26 32.51,57.66 34.16,57.66 36.07,55.75 36.07,50.16 | 28.96,56.26 28.96,48.64 v28.32,48.64 | v24.51,48.64 14.1,48.64 12.7,47.37 11.18,47.37 | 11.18,47.37 9.91,47.37 | 11.18,47.37 11.18,44.2 9.27,44.2 8.64,43.56 8.64,42.29 | 8.64,41.15 8.64,42.29 | 8.64,41.15 11.81,41.15 13.08,40.01 13.08,39.37 13.59,39.37 | 8.64,41.15 8.64,25.78 9.27,25.15 | 41.66,36.58 43.05,37.97 43.05,40.39 42.04,41.4 38.86,41.4 35.69,44.2 35.69,47.37 36.07,47.75 36.07,50.16 | 8.64,42.29 9.27,42.29 | 36.07,50.16 37.08,50.16
  Top 0.406: 41.66,36.58 41.66,34.67 43.56,34.67 JP10.1
  Bottom 0.254: 19.56,62.74 19.68,62.87 v19.68,64.14 | v24.51,48.64 v28.32,48.64
S$115
  Bottom 0.61: 15.37,1.27 15.37,3.17 14.86,3.68
S$116
  Top 0.254: 17.53,3.56 16.89,3.56
S$117
  Top 0.406: 42.47,69.34 43.74,69.34
S$118
  Top 0.254: 11.43,42.55 12.7,42.55
S$119
  Top 0.254: JP5.2 5.46,20.7 | 5.46,20.7 8,20.7 9.27,21.97 9.27,23.88 | 5.46,20.7 5.46,18.8
  Top 0.61: 1.02,20.7 JP5.2
S$120
  Bottom 0.254: 39.5,65.41 40.39,65.41 40.39,61.59 | 40.39,61.59 39.62,61.59 | 40.39,57.91 40.39,61.59 | 40.39,57.91 39.5,57.91 | 39.24,53.98 40.39,53.98 40.39,57.91
S$121
  Bottom 0.61: 17.53,3.56 18.16,3.56 19.43,4.83
S$122
  Bottom 0.254: JP7.1 7.62,13.46 7.62,7.62
S$123
  Bottom 0.61: 28.07,14.35 28.57,14.35
S$124
  Top 0.406: 33.4,74.68 34.29,74.68 34.29,73.41
S$125
  Top 0.406: 37.34,75.18 36.32,75.18 36.32,73.41
S$126
  Top 0.254: 34.67,54.99 34.67,53.72 34.04,53.09
S$127
  Bottom 0.254: 7.37,4.85 7.37,5.84
S$128
  Bottom 0.254: 7.37,2.97 8.38,2.97 9.3,2.06
S$129  (via drill 0.71)
  Top 0.254: 10.41,40.01 11.3,40.01 v11.81,39.37
  Bottom 0.254: 13.08,31.75 13.08,37.47 v11.81,39.37
S$130  (via drill 0.71)
  Bottom 0.406: KIT1.P$28 27.05,39.75 v26.67,40.13
S$131
  Bottom 0.254: 15.01,49.76 15.8,49.1
S$132
  Bottom 0.254: 15.01,49.07 15.8,49.86
S$133
  Bottom 0.61: 26.42,11.81 27.56,10.41
S$134
  Bottom 0.254: KIT1.P$12 8.64,41.02 8.64,35.94 9.27,35.31 9.27,13.08 JP13.8
  Bottom 0.61: JP13.8 10.79,11.81 9.4,13.21
S$135  (via drill 0.71)
  Top 0.254: v26.67,38.61 24.77,38.61 24.51,38.86 21.97,38.86 | 21.97,38.86 18.92,38.86 17.65,39.88 14.48,39.88 | 21.97,38.86 21.97,39.75
  Bottom 0.406: v26.67,38.61 28.83,38.61 KIT1.P$27
S$136
  Bottom 0.61: JP13.1 29.34,11.81 30.35,12.83
S$137  (via drill 0.7)
  other vias: 15.62,42.29
S$138  (via drill 0.7)
  other vias: 10.79,37.59
S$139
  Bottom 0.254: 15.88,42.55 13.34,42.55 10.79,40.01 10.79,37.47
S$140
  Top 0.254: 25.46,33.4 27.05,32.13 27.05,29.91 26.1,29.91
S$150
  Top 0.254: 20.7,42.29 23.24,42.29 | 20.07,42.29 20.7,42.29 | 20.7,42.29 20.7,44.2
S$151
  Top 0.254: 24.64,48.64 24.64,47.62 25.53,46.74 25.53,45.47 24.64,44.58 24.64,42.42
S$153
  Top 0.254: 9.91,29.97 11.68,29.97
S$154  (via drill 0.71)
  Top 0.254: v10.29,28.83 9.78,29.34 9.78,29.84 | v10.29,35.94 10.29,35.05
  Bottom 0.254: v10.29,28.83 v10.29,35.94
VBAT  (1 unrouted)
  Top 0.406: 36.58,57.53 37.21,57.53
  Top 0.61: 28.96,72.77 30.86,72.77 32.77,70.87 34.01,70.87 | 34.01,70.87 34.8,70.87 | 34.01,70.87 34.01,68.33 34.04,67.69 34.04,60.2 | 33.4,60.71 36.58,57.53 40.39,53.72 46.23,53.72 46.23,8.64 45.47,8 41.91,8 35.31,1.4 12.57,1.4 12.57,3.68
(copper drawn outside any net)
  shapes: Bottom area x1, Top area x5

## Text on the board
tNames: - | + | IO
Reference: Mbed | 1 | 40 | TEL | LED | GPS | ARM | IO | 9dof | AN IN | RC | 20 | 21 | RF | GND | +5 | J1 | SIG | J2 | I2C | K8 | K7 | K6 | K5 | K4 | K3 | K2 | K1 | VA | UAVX Mbed | V1.0 | 2011